# EAGLE board ascender_board (EAGLE 9.0.0)
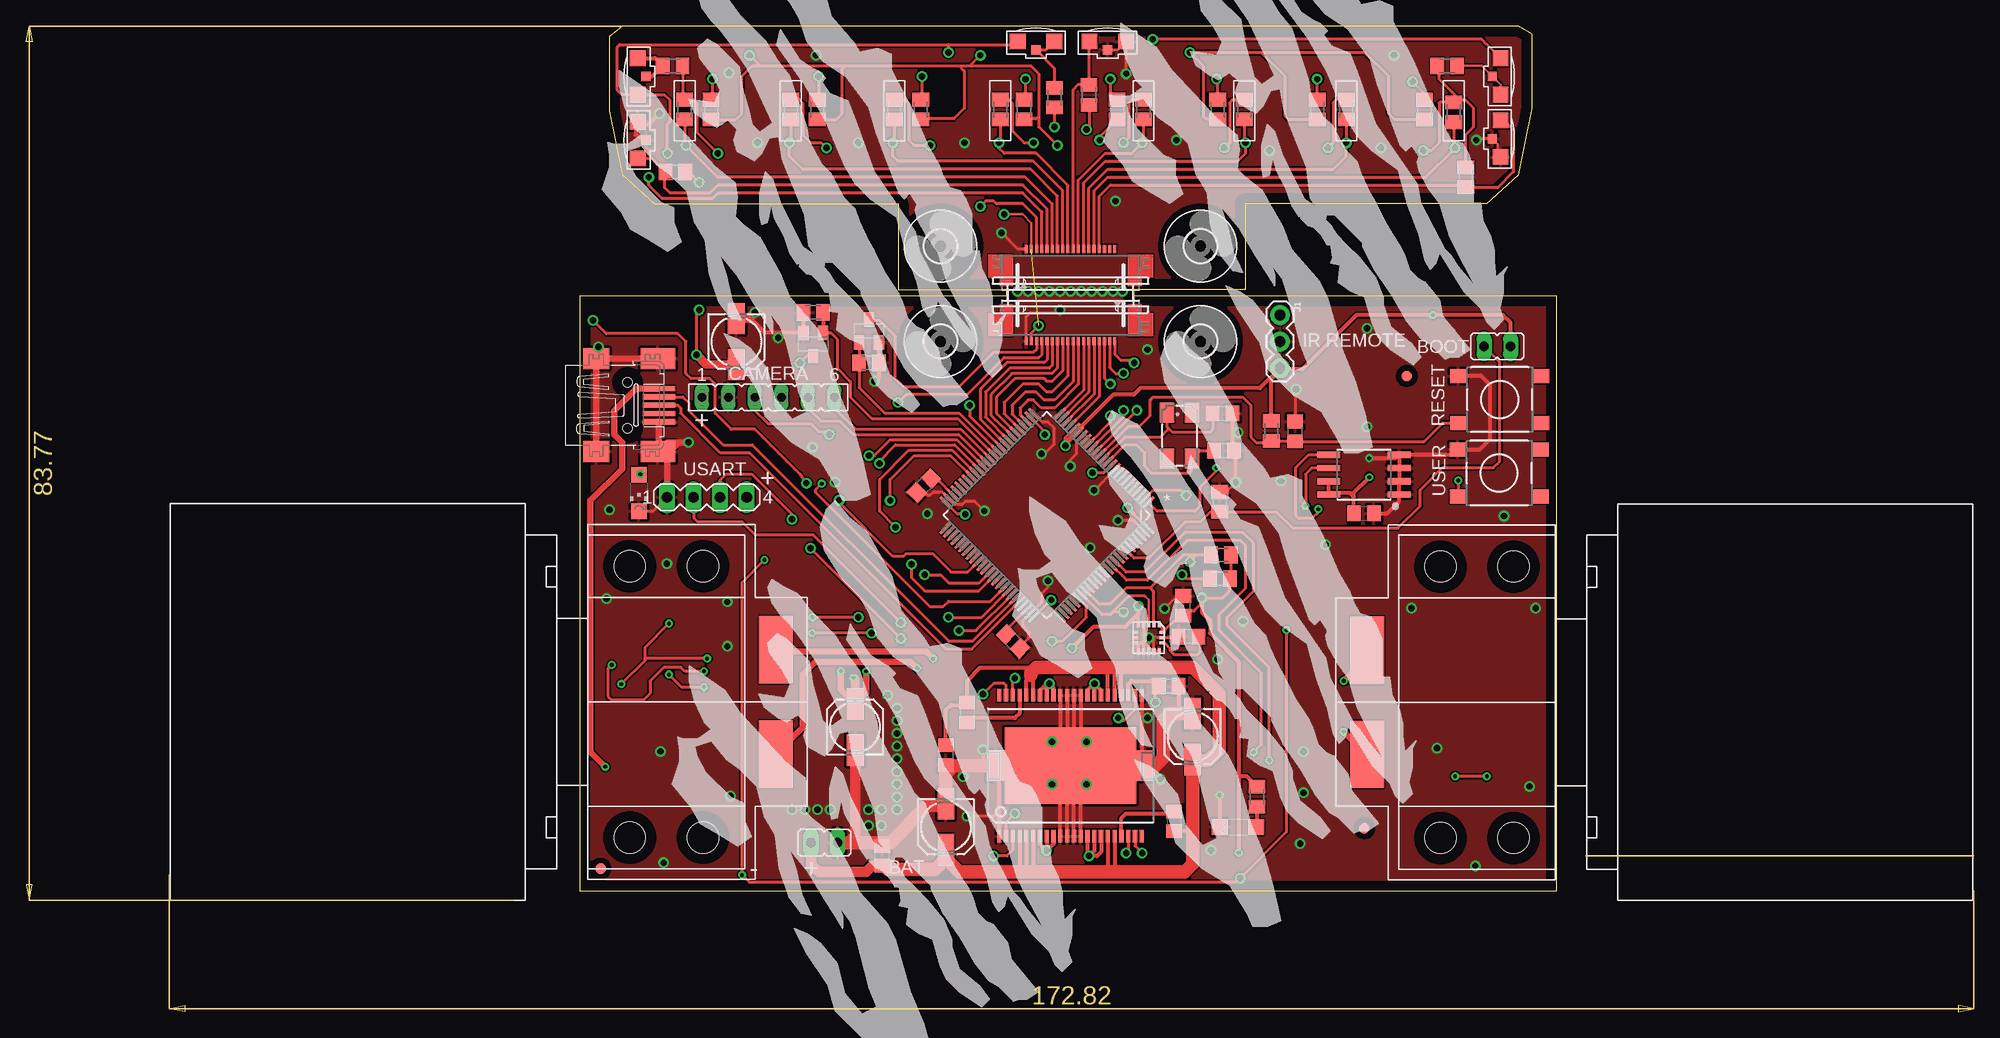
[diagram p0: board, top side]
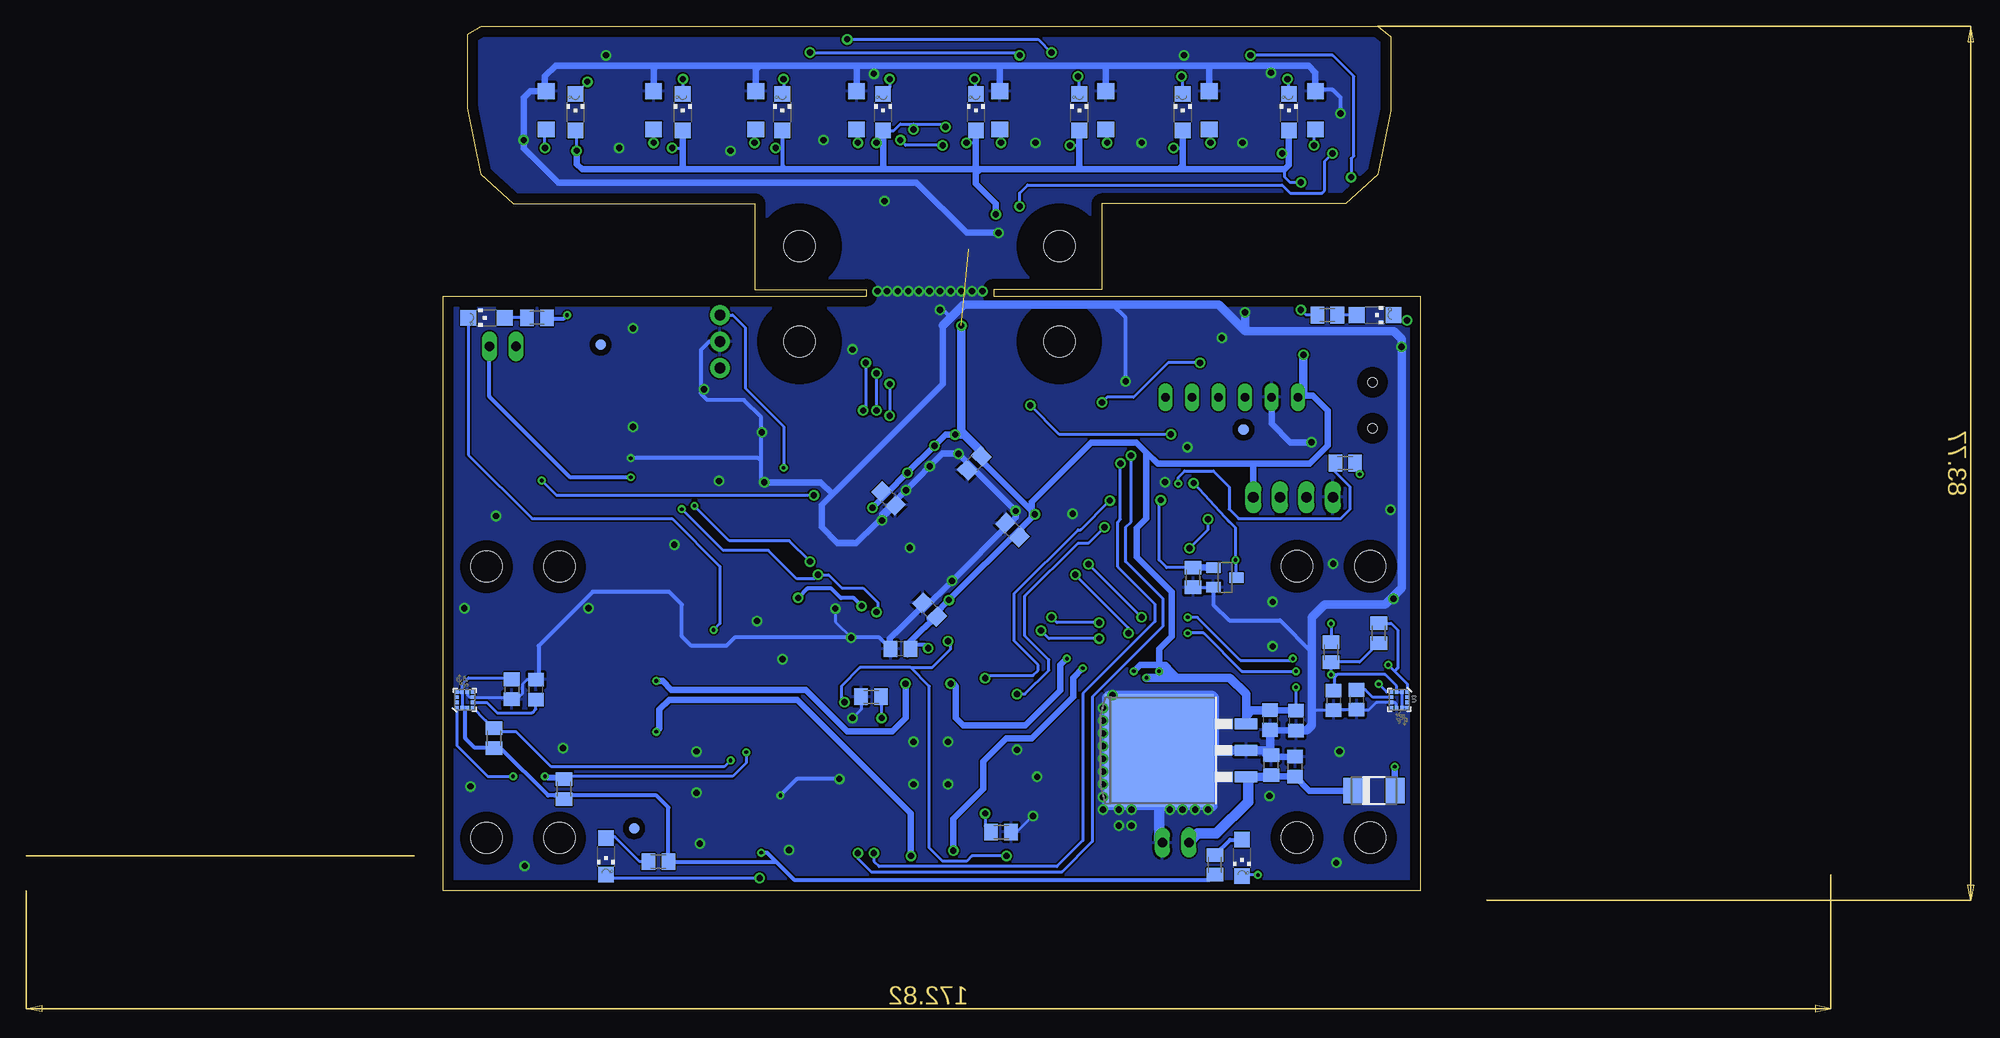
[diagram p1: board, bottom side, seen from below]

Size 93.57 x 82.86 mm. Coordinates in mm from the lower left corner, seen from the top.
Outline: 86.87,65.84 89.92,68.63 91.19,74.98 91.19,82.09 89.92,82.86 4.06,82.86 2.79,81.84 2.79,74.73 4.06,68.63 7.11,65.84 30.48,65.84 30.48,57.61 40.84,57.61 40.84,57 0,57 0,0 93.57,0 93.57,57 53.03,57 53.03,57.61 63.7,57.61 63.7,65.84 86.87,65.84
Copper layers (1*16): Top 0.035mm / dielectric 1.5mm / Bottom 0.035mm
Design rules "default *": minimum track width 8mil, minimum drill 24mil, track to track 6mil, track to pad 6mil, pad to pad 6mil, via to via 6mil, smd to smd 0mil, copper to edge 40mil, drill to drill 8mil, minimum pad ring 10mil, minimum via ring 8mil, stop-mask expansion 4mil, vias tented up to drill 0mil, thermal gap 10mil

## Footprints (pad centres in the part's own frame; a part is rotated, then mirrored left to right if it is on the bottom)
JP1 = drill 0.914 long: 1 0,-1.27; 2 0,1.27
C0805 = smd 1.3 x 1.5: 1 -0.95,0; 2 0.95,0
153CLV-0505 = smd 3 x 1.6: + 2.2,0; - -2.2,0
FE06 = drill 0.813 long: 1 -6.35,0; 2 -3.81,0; 3 -1.27,0; 4 1.27,0; 5 3.81,0; 6 6.35,0
DO-214AC = smd 1.8 x 2.4: A 2.025,0; C -2.025,0
3,0 = hole 3: 0,0
TO263-3 = smd 1.067 x 2.159: 1 -2.54,-5.791; 2 0,-5.791; 3 2.54,-5.791 | smd 10.8 x 10.41: TAB 0,2.54
HSOP44 = smd 0.4 x 1.2: 1 -6.825,-6.75; 2 -6.175,-6.75; 3 -5.525,-6.75; 4 -4.875,-6.75; 5 -4.225,-6.75; 6 -3.575,-6.75; 7 -2.925,-6.75; 8 -2.275,-6.75; 9 -1.625,-6.75; 10 -0.975,-6.75; 11 -0.325,-6.75; 12 0.325,-6.75; 13 0.975,-6.75; 14 1.625,-6.75; 15 2.275,-6.75; 16 2.925,-6.75; 17 3.575,-6.75; 18 4.225,-6.75; 19 4.875,-6.75; 20 5.525,-6.75; 21 6.175,-6.75; 22 6.825,-6.75; 23 6.825,6.75; 24 6.175,6.75; 25 5.525,6.75; 26 4.875,6.75; 27 4.225,6.75; 28 3.575,6.75; 29 2.925,6.75; 30 2.275,6.75; 31 1.625,6.75; 32 0.975,6.75; 33 0.325,6.75; 34 -0.325,6.75; 35 -0.975,6.75; 36 -1.625,6.75; 37 -2.275,6.75; 38 -2.925,6.75; 39 -3.575,6.75; 40 -4.225,6.75; 41 -4.875,6.75; 42 -5.525,6.75; 43 -6.175,6.75; 44 -6.825,6.75 | smd 12.6 x 7.3: EH@1 0,0 | smd 1.7 x 2.9: EH@2 -7.15,0; EH@3 7.15,0
1X03 = drill 1.016 pad 1.88: 1 0,0; 2 2.54,0; 3 5.08,0
CHIPLED_1206 = smd 1.5 x 1.5: A 0,-1.75; C 0,1.75
CTS406 = smd 1.9 x 1.4: 1 -2.2,-1.2; 2 2.2,-1.2; 3 2.2,1.2; 4 -2.2,1.2
SOT23 = smd 1 x 1.4: 1 -0.95,-1.1; 2 0.95,-1.1; 3 0,1.1
M0805 = smd 1.3 x 1.6: 1 -0.95,0; 2 0.95,0
DTSM-6 = smd 1.55 x 1.3: 1 -3.975,2.25; 2 3.975,2.25; 3 -3.975,-2.25; 4 3.975,-2.25
QFP50P1600X1600X160-100N = smd 1.473 x 0.254: 1 -7.722,5.994; 2 -7.722,5.512; 3 -7.722,5.004; 4 -7.722,4.496; 5 -7.722,3.988; 6 -7.722,3.505; 7 -7.722,2.997; 8 -7.722,2.489; 9 -7.722,2.007; 10 -7.722,1.499; 11 -7.722,0.991; 12 -7.722,0.508; 13 -7.722,0; 14 -7.722,-0.508; 15 -7.722,-0.991; 16 -7.722,-1.499; 17 -7.722,-2.007; 18 -7.722,-2.489; 19 -7.722,-2.997; 20 -7.722,-3.505; 21 -7.722,-3.988; 22 -7.722,-4.496; 23 -7.722,-5.004; 24 -7.722,-5.512; 25 -7.722,-5.994; 51 7.722,-5.994; 52 7.722,-5.512; 53 7.722,-5.004; 54 7.722,-4.496; 55 7.722,-3.988; 56 7.722,-3.505; 57 7.722,-2.997; 58 7.722,-2.489; 59 7.722,-2.007; 60 7.722,-1.499; 61 7.722,-0.991; 62 7.722,-0.508; 63 7.722,0; 64 7.722,0.508; 65 7.722,0.991; 66 7.722,1.499; 67 7.722,2.007; 68 7.722,2.489; 69 7.722,2.997; 70 7.722,3.505; 71 7.722,3.988; 72 7.722,4.496; 73 7.722,5.004; 74 7.722,5.512; 75 7.722,5.994 | smd 0.254 x 1.473: 26 -5.994,-7.722; 27 -5.512,-7.722; 28 -5.004,-7.722; 29 -4.496,-7.722; 30 -3.988,-7.722; 31 -3.505,-7.722; 32 -2.997,-7.722; 33 -2.489,-7.722; 34 -2.007,-7.722; 35 -1.499,-7.722; 36 -0.991,-7.722; 37 -0.508,-7.722; 38 0,-7.722; 39 0.508,-7.722; 40 0.991,-7.722; 41 1.499,-7.722; 42 2.007,-7.722; 43 2.489,-7.722; 44 2.997,-7.722; 45 3.505,-7.722; 46 3.988,-7.722; 47 4.496,-7.722; 48 5.004,-7.722; 49 5.512,-7.722; 50 5.994,-7.722; 76 5.994,7.722; 77 5.512,7.722; 78 5.004,7.722; 79 4.496,7.722; 80 3.988,7.722; 81 3.505,7.722; 82 2.997,7.722; 83 2.489,7.722; 84 2.007,7.722; 85 1.499,7.722; 86 0.991,7.722; 87 0.508,7.722; 88 0,7.722; 89 -0.508,7.722; 90 -0.991,7.722; 91 -1.499,7.722; 92 -2.007,7.722; 93 -2.489,7.722; 94 -2.997,7.722; 95 -3.505,7.722; 96 -3.988,7.722; 97 -4.496,7.722; 98 -5.004,7.722; 99 -5.512,7.722; 100 -5.994,7.722
SO08-EIAJ = smd 0.61 x 2.21: 1 -1.905,-3.378; 2 -0.635,-3.378; 3 0.635,-3.378; 4 1.905,-3.378; 5 1.905,3.353; 6 0.635,3.353; 7 -0.635,3.353; 8 -1.905,3.353
SPARKFUN-DIGITALIC_LGA-12 = smd 0.375 x 0.35: 1 -0.75,0.75; 2 -0.75,0.25; 3 -0.75,-0.25; 4 -0.75,-0.75; 7 0.75,-0.75; 8 0.75,-0.25; 9 0.75,0.25; 10 0.75,0.75 | smd 0.35 x 0.375: 5 -0.25,-0.75; 6 0.25,-0.75; 11 0.25,0.75; 12 -0.25,0.75
ST_LGA16L = smd 0.6 x 0.3: P$1 -1.3,1; P$2 -1.3,0.5; P$3 -1.3,0; P$4 -1.3,-0.5; P$5 -1.3,-1; P$9 1.3,-1; P$10 1.3,-0.5; P$11 1.3,0; P$12 1.3,0.5; P$13 1.3,1 | smd 0.3 x 0.6: P$6 -0.5,-1.3; P$7 0,-1.3; P$8 0.5,-1.3; P$14 0.5,1.3; P$15 0,1.3; P$16 -0.5,1.3
FIDUCIAL_1MM = smd 1 x 1: 1 0,0
SFH3710 = smd 1.52 x 1.6: P$1 -1.75,0; P$2 1.9,0
KPA3010 = smd 1.5 x 1.5: P$1_COL -1.75,0.8; P$2_EM 1.75,0.8 | smd 0.9 x 0.9: P$3-NC 0,0
JSUMO_MOTOR_WITH_WHEEL = smd 3.251 x 6.452: P$1 18,5; P$2 18,-5 | hole 3: 4,-13; 11,-13; 4,13; 11,13
MA04-1 = drill 1.016 long: 1 -3.81,0; 2 -1.27,0; 3 1.27,0; 4 3.81,0
52745-1890 = smd 0.3 x 0.8: 1 -4.25,2.5; 2 -3.75,2.5; 3 -3.25,2.5; 4 -2.75,2.5; 5 -2.25,2.5; 6 -1.75,2.5; 7 -1.25,2.5; 8 -0.75,2.5; 9 -0.25,2.5; 10 0.25,2.5; 11 0.75,2.5; 12 1.25,2.5; 13 1.75,2.5; 14 2.25,2.5; 15 2.75,2.5; 16 3.25,2.5; 17 3.75,2.5; 18 4.25,2.5
32005-201 = smd 3.1 x 0.5: 1 3,1.6; 2 3,0.8; 3 3,0; 4 3,-0.8; 5 3,-1.6 | smd 2.5 x 2: M1 -3,-4.45; M2 -3,4.45 | smd 3.3 x 2: M3 2.9,4.45; M4 2.9,-4.45 | hole 0.9: 0,2.2; 0,-2.2

## Placement (x,y rotation side)
BAT  LiPol  [JP1]  23.42,4.62 90 top
BOOT  [JP1]  87.86,52.17 270 top
C1  [C0805]  61.54,45.75 0 top
C2  18p  [C0805]  61.7,42.19 0 top
C3  100n  [C0805]  68.5,44.02 90 top
C4  2.2uF  [C0805]  32.94,38.84 225 top
C5  2.2uF  [C0805]  41.48,23.9 135 top
C6  100n  [C0805]  42.7,40.97 225 bottom
C7  100n  [C0805]  39.04,34.57 135 bottom
C8  100n  [C0805]  46.96,26.95 135 bottom
C9  100n  [C0805]  50.93,37.62 315 bottom
C10  100n  [C0805]  14.26,12.06 90 bottom
C11  10uF  [C0805]  11.97,11.9 90 bottom
C12  100n  [C0805]  11.87,16.32 270 bottom
C13  10uF  [C0805]  14.36,16.37 270 bottom
C14  10n  [C0805]  58.29,24.36 180 top
C15  100n  [C0805]  57.78,27.31 90 top
C16  100n  [C0805]  49.77,23.18 180 bottom
C17  100n  [C0805]  37.08,17.07 270 top
C18  100n  [C0805]  56.9,6.65 270 top
C19  100n  [C0805]  35.05,13 270 top
C20  [153CLV-0505]  35.05,6.15 270 top
C21  [153CLV-0505]  58.67,14.78 270 top
C22  [153CLV-0505]  26.37,15.7 90 top
C23  100n  [C0805]  28.96,3.35 90 top
C24  [153CLV-0505]  14.99,52.63 270 top
C25  100n  [C0805]  6.09,18.3 270 bottom
C26  100n  [C0805]  75.08,36.17 0 top
C27  100n  [C0805]  8.29,18.25 270 bottom
C28  100n  [C0805]  84.68,19.29 90 bottom
C29  100n  [C0805]  87,19.3 270 bottom
CAMERA  [FE06]  18.03,47.3 0 top
D1  [DO-214AC]  4.42,9.6 0 bottom
H1  MOUNT-HOLE3.0  [3,0]  59.44,61.77 0 top
H2  MOUNT-HOLE3.0  [3,0]  34.54,61.77 0 top
H3  MOUNT-HOLE3.0  [3,0]  59.44,52.63 0 top
H4  MOUNT-HOLE3.0  [3,0]  34.54,52.63 0 top
IC1  LM2937  [TO263-3]  22.45,13.46 90 bottom
IC2  MC33932  [HSOP44]  46.99,11.99 0 top
J1  455-1750-1-ND  [1X03]  67.06,55.17 270 top
LED1  [CHIPLED_1206]  5.65,38.13 180 top
LED2  [CHIPLED_1206]  63.03,6.11 90 top
LED3  [CHIPLED_1206]  4.32,55.17 270 bottom
LED4  [CHIPLED_1206]  89.41,54.91 90 bottom
LED5  [CHIPLED_1206]  77.98,3.3 180 bottom
LED6  [CHIPLED_1206]  17.07,3.15 180 bottom
LED7  [CHIPLED_1206]  80.9,74.6 0 bottom
LED8  [CHIPLED_1206]  70.61,74.6 0 bottom
LED9  [CHIPLED_1206]  61.09,74.6 0 bottom
LED10  [CHIPLED_1206]  51.44,74.6 0 bottom
LED11  [CHIPLED_1206]  42.55,74.6 0 bottom
LED12  [CHIPLED_1206]  32.64,74.6 0 bottom
LED13  [CHIPLED_1206]  22.73,74.6 0 bottom
LED14  [CHIPLED_1206]  12.57,74.6 0 bottom
Q1  8MHz  [CTS406]  57.43,43.61 270 top
Q2  BSS123  [SOT23]  22.35,52.38 180 top
Q3  BSS123  [SOT23]  27.69,53.65 0 top
Q4  BSS123  [SOT23]  18.69,30.02 270 bottom
R1  4k7  [M0805]  66.22,44.07 90 top
R2  4k7  [M0805]  61.29,37.26 270 top
R3  4k7  [M0805]  7.18,40.98 180 bottom
R4  4k7  [M0805]  61.29,29.9 0 top
R5  4k7  [M0805]  61.39,32.18 0 top
R6  4k7  [M0805]  64.86,9.03 90 top
R7  4k7  [M0805]  56.39,19.61 180 top
R8  4k7  [M0805]  40.13,5.64 180 bottom
R9  4k7  [M0805]  52.58,18.59 180 bottom
R10  4k7  [M0805]  22.35,55.42 0 top
R11  4k7  [M0805]  27.69,50.6 180 top
R12  4k7  [M0805]  21.74,30.02 90 bottom
R13  330  [M0805]  8.89,55.17 180 bottom
R14  330  [M0805]  84.58,54.91 0 bottom
R15  330  [M0805]  72.95,2.79 0 bottom
R16  330  [M0805]  19.66,2.49 270 bottom
R17  4k7  [M0805]  3.96,24.69 270 bottom
R18  4k7  [M0805]  83.69,74.6 90 top
R19  330  [M0805]  80.9,74.85 90 top
R20  4k7  [M0805]  73.41,74.85 90 top
R21  330  [M0805]  70.61,74.85 90 top
R22  4k7  [M0805]  63.63,74.85 90 top
R23  330  [M0805]  61.09,74.85 90 top
R24  4k7  [M0805]  53.98,74.85 90 top
R25  330  [M0805]  51.44,74.85 90 top
R26  4k7  [M0805]  40.26,74.85 90 top
R27  330  [M0805]  42.55,74.85 90 top
R28  4k7  [M0805]  30.1,74.85 90 top
R29  330  [M0805]  32.64,74.85 90 top
R30  4k7  [M0805]  20.19,74.85 90 top
R31  330  [M0805]  22.73,74.85 90 top
R32  4k7  [M0805]  10.03,74.85 90 top
R33  330  [M0805]  12.57,74.85 90 top
R34  4k7  [M0805]  84.84,68.38 90 top
R35  22  [M0805]  45.47,76 270 top
R36  4k7  [M0805]  48.77,76.25 270 top
R37  22  [M0805]  8.89,79.05 0 top
R38  4k7  [M0805]  9.14,68.89 0 top
R39  22  [M0805]  83.06,79.05 180 top
R40  4k7  [M0805]  8.53,22.86 270 bottom
R41  4k7  [M0805]  81.99,9.75 270 bottom
R42  4k7  [M0805]  88.7,14.63 270 bottom
RESET  DTSM-6  [DTSM-6]  88.1,47.07 0 top
RUN  DTSM-6  [DTSM-6]  88.04,40.03 0 top
U1  STM32F722XX  [QFP50P1600X1600X160-100N]  44.73,35.99 225 top
U2  I2C EEPROM  [SO08-EIAJ]  75.08,39.88 90 top
U3  SPARKFUN-DIGITALIC_LSM303C  [SPARKFUN-DIGITALIC_LGA-12]  2,18.3 270 bottom
U4  SPARKFUN-DIGITALIC_LSM303C  [SPARKFUN-DIGITALIC_LGA-12]  91.5,18.3 90 bottom
U$1  [SCAR]  23.57,41.5 225 top
U$2  ST_L3GD20H  [ST_LGA16L]  54.48,24.26 270 top
U$3  FIDUCIAL  [FIDUCIAL_1MM]  75.13,5.99 0 top
U$4  FIDUCIAL  [FIDUCIAL_1MM]  79.2,49.33 0 top
U$5  FIDUCIAL  [FIDUCIAL_1MM]  1.98,2.13 0 top
U$6  FIDUCIAL  [FIDUCIAL_1MM]  16.92,44.2 0 bottom
U$7  FIDUCIAL  [FIDUCIAL_1MM]  75.29,5.99 0 bottom
U$8  FIDUCIAL  [FIDUCIAL_1MM]  78.49,52.32 0 bottom
U$11  SFH3710  [SFH3710]  83.69,74.85 270 bottom
U$12  KPA3010  [KPA3010]  87.38,72.06 270 top
U$13  KPA3010_EM  [KPA3010]  43.69,80.57 0 top
U$14  SFH3710  [SFH3710]  73.41,74.85 270 bottom
U$15  SFH3710  [SFH3710]  63.63,74.85 270 bottom
U$16  SFH3710  [SFH3710]  53.98,74.85 270 bottom
U$17  SFH3710  [SFH3710]  40.26,74.85 270 bottom
U$18  SFH3710  [SFH3710]  30.1,74.85 270 bottom
U$19  SFH3710  [SFH3710]  20.19,74.85 270 bottom
U$20  SFH3710  [SFH3710]  10.03,74.85 270 bottom
U$21  [SCAR]  64.92,103.06 225 top  (outside the outline)
U$22  [SCAR]  16.87,98.49 225 top  (outside the outline)
U$24  [SCAR]  56.19,57.65 225 top
U$26  JSUMO_MOTOR_WITH_WHEEL  [JSUMO_MOTOR_WITH_WHEEL]  0.78,18.1 0 top
U$27  JSUMO_MOTOR_WITH_WHEEL  [JSUMO_MOTOR_WITH_WHEEL]  93.41,18.07 180 top
U$29  KPA3010  [KPA3010]  50.55,80.57 0 top
U$30  KPA3010_EM  [KPA3010]  6.35,78.03 90 top
U$31  KPA3010  [KPA3010]  6.35,71.93 90 top
U$32  KPA3010_EM  [KPA3010]  87.38,78.03 270 top
USART  [MA04-1]  12.17,37.72 0 top
X2  52745-1890  [52745-1890]  46.99,55.17 180 top
X3  52745-1890  [52745-1890]  46.99,58.98 0 top
X4  MINI-USB-SCHIELD-32005-201  [32005-201]  4.57,46.53 0 top

## Library data of the parts
BAT BOOT = jumper
C1-C29 R1-R42 = resistor
CAMERA = con-lsta; OC_FARNELL: unknown; OC_NEWARK: unknown
D1 = diode
H1-H4 = holes
IC1 LED1-LED14 U$11-U$20 U$29-U$32 = my_parts
IC2 = freescale; MPN: MC33932VW; OC_FARNELL: 1701639; OC_NEWARK: 67P3304
J1 = SparkFun-Connectors; PROD_ID: XXX-00000
Q1 = crystal; OC_FARNELL: unknown; OC_NEWARK: unknown
Q2-Q4 = transistor-small-signal
RESET RUN = switch-tact
U1 = stm32; MPN: STM32F407VET6; OC_FARNELL: 2064367; OC_NEWARK: 73T2332; PACKAGE: 100LQFP; SUPPLIER: STMicroelectronics
U2 = SparkFun-IC-Memory; PROD_ID: NA-XXXXX
U3 U4 = SparkFun_LSM303C_6_DOF_IMU_Breakout
U$1 U$21 U$22 U$24 = shapes
U$2 = main
U$3-U$8 = adafruit
U$26 U$27 = my_libs
USART = con-lstb; OC_FARNELL: unknown; OC_NEWARK: unknown
X2 X3 = con-molex; MF: MOLEX; MPN: 52745-1890; OC_FARNELL: unknown; OC_NEWARK: 66F4273
X4 = con-cypressindustries; OC_FARNELL: unknown; OC_NEWARK: unknown

## Nets
+3V3: BOOT.2 C6.1 C7.1 C8.1 C9.1 C12.1 C13.1 C15.1 C16.1 C22.+ C24.+ C26.1 C27.1 C29.1 CAMERA.1 IC1.3 J1.3 LED7.A LED8.A LED9.A LED10.A LED11.A LED12.A LED13.A LED14.A R1.2 R4.2 R5.2 R6.2 R13.2 R14.2 R15.2 R16.2 R17.2 R18.2 R20.2 R22.2 R24.2 R26.2 R28.2 R30.2 R32.2 R34.2 R35.2 R36.2 R37.2 R38.2 R39.2 R40.2 R41.2 R42.2 U1.11 U1.20 U1.21 U1.27 U1.50 U1.75 U1.100 U2.7 U2.8 U3.2 U3.3 U3.9 U3.10 U4.2 U4.3 U4.9 U4.10 U$2.P$1 U$2.P$5 U$2.P$16 USART.4 X2.17 X3.2
ADC0: U1.22 X2.4
ADC1: U1.23 X2.5
ADC1_S: R18.1 U$11.P$2 X3.14
ADC2: U1.24 X2.6
ADC2_S: R20.1 U$14.P$2 X3.13
ADC3: U1.25 X2.7
ADC3_S: R22.1 U$15.P$2 X3.12
ADC4: U1.28 X2.8
ADC4_S: R24.1 U$16.P$2 X3.11
ADC5: U1.29 X2.9
ADC6: U1.30 X2.10
ADC6_S: R26.1 U$17.P$2 X3.9
ADC7: U1.31 X2.11
ADC7_S: R28.1 U$18.P$2 X3.8
ADC8: U1.32 X2.12
ADC8_S: R30.1 U$19.P$2 X3.7
ADC9: U1.33 X2.13
ADC9_S: R32.1 U$20.P$2 X3.6
ADC10: U1.34 X2.14
ADC11: CAMERA.3 U1.35
BOOT: BOOT.1 R2.2 U1.94
CAM_CLK: CAMERA.5 U1.39
CAM_SI: CAMERA.6 U1.38
ENC_LEFT_SCL: R17.1 U1.63 U3.1
ENC_LEFT_SDA: R40.1 U1.64 U3.4
ENC_RIGHT_SCL: R41.1 U1.90 U4.1
ENC_RIGHT_SDA: R42.1 U1.91 U4.4
FRONT_GPIO: U1.17 X2.3
FRONT_SCL: U1.15 X2.1
FRONT_SDA: U1.16 X2.2
GND: BAT.1 C1.2 C2.2 C3.2 C4.2 C5.1 C6.2 C7.2 C8.2 C9.2 C10.2 C11.2 C12.2 C13.2 C14.2 C15.2 C16.2 C19.2 C20.- C21.- C22.- C23.2 C24.- C25.2 C26.2 C27.2 C28.2 C29.2 CAMERA.2 IC1.2 IC2.1 IC2.10 IC2.11 IC2.12 IC2.13 IC2.23 IC2.32 IC2.33 IC2.34 IC2.35 IC2.EH@1 IC2.EH@2 IC2.EH@3 J1.2 LED1.C LED2.C Q2.2 Q3.2 Q4.2 R2.1 R7.1 R8.1 R9.2 R10.1 R11.1 R12.1 RESET.1 RUN.1 U1.10 U1.19 U1.26 U1.49 U1.74 U1.99 U2.1 U2.2 U2.3 U2.4 U3.6 U3.8 U4.6 U4.8 U$2.P$4 U$2.P$8 U$2.P$9 U$2.P$10 U$2.P$11 U$2.P$12 U$2.P$13 U$2.P$15 U$11.P$1 U$12.P$2_EM U$12.P$3-NC U$14.P$1 U$15.P$1 U$16.P$1 U$17.P$1 U$18.P$1 U$19.P$1 U$20.P$1 U$29.P$2_EM U$29.P$3-NC U$31.P$2_EM U$31.P$3-NC USART.1 X2.18 X3.1 X4.5 X4.M1 X4.M2 X4.M3 X4.M4
IR_A: Q2.3 X2.15
IR_A_CONTROLL: Q2.1 R10.2 U1.37
IR_A_S: R19.1 R21.1 R23.1 R25.1 R27.1 R29.1 R31.1 R33.1 X3.4
IR_B: Q3.3 X2.16
IR_B_CONTROLL: Q3.1 R11.2 U1.36
IR_B_S: U$13.P$1_COL U$30.P$1_COL U$32.P$1_COL X3.3
IR_FRONT_S: R36.1 U$29.P$1_COL X3.10
IR_LEFT_S: R38.1 U$31.P$1_COL X3.5
IR_REMOTE: J1.1 U1.1
IR_RIGHT_S: R34.1 U$12.P$1_COL X3.15
KEY: RUN.3 U1.2
LED: R3.2 U1.67
LED_BACK: Q4.1 R12.2 U1.60
MOTOR_ENABLE: IC2.3 IC2.25 R7.2 U1.81
N$1: C2.1 Q1.3 U1.12
N$2: C1.1 Q1.1 U1.13
N$3: C4.1 U1.48
N$4: C5.2 U1.73
N$5: LED1.A R3.1
N$6: C14.1 U$2.P$14
N$7: IC2.7 IC2.8 IC2.9 U$26.P$2
N$8: IC2.36 IC2.37 IC2.38 U$26.P$1
N$9: IC2.14 IC2.15 IC2.16 U$27.P$1
N$10: IC2.29 IC2.30 IC2.31 U$27.P$2
N$11: LED2.A R6.1
N$12: C17.2 IC2.41
N$13: IC2.2 R8.2
N$14: C18.1 IC2.19
N$15: IC2.24 R9.1
N$16: LED3.C LED4.C LED5.C LED6.C Q4.3
N$17: LED3.A R13.1
N$18: D1.A X4.1
N$19: LED4.A R14.1
N$20: C28.1 U4.5
N$21: LED5.A R15.1
N$22: LED8.C R21.2
N$23: LED6.A R16.1
N$24: LED7.C R19.2
N$25: LED9.C R23.2
N$26: LED10.C R25.2
N$27: LED11.C R27.2
N$28: LED12.C R29.2
N$29: LED13.C R31.2
N$30: LED14.C R33.2
N$31: R37.1 U$30.P$2_EM U$30.P$3-NC
N$32: R35.1 U$13.P$2_EM U$13.P$3-NC
N$33: R39.1 U$32.P$2_EM U$32.P$3-NC
N$34: C25.1 U3.5
NC: CAMERA.4
PWM_A_LEFT: IC2.43 U1.42
PWM_A_RIGHT: IC2.21 U1.40
PWM_B_LEFT: IC2.42 U1.43
PWM_B_RIGHT: IC2.20 U1.41
RESET: C3.1 R1.1 RESET.3 U1.14
SCL: R5.1 U1.83 U2.6 U$2.P$2
SDA: R4.1 U1.82 U2.5 U$2.P$3
USART1_RX: U1.69 USART.3
USART1_TX: U1.68 USART.2
USBDM: U1.70 X4.2
USBDP: U1.71 X4.3
VBAT: U1.6
VCC: BAT.2 C10.1 C11.1 C17.1 C18.2 C19.1 C20.+ C21.+ C23.1 D1.C IC1.1 IC2.4 IC2.5 IC2.6 IC2.17 IC2.18 IC2.26 IC2.27 IC2.28 IC2.39 IC2.40

## Tracks (layer width: path | path; a pad name or v marks a point on that pad's centre or on a via)
+3V3  (via drill 0.35, 0.6)  (1 unrouted)
  Top 0.254: v40.64,64.82 42.42,64.82 43.24,64 X3.2 | R39.2 82.11,78.47
  Top 0.305: U1.100 54.38,34.77 v52.45,36.7 53.36,35.79 | v36.91,36.09 36.15,36.09 U1.50 | v44.52,43.71 44.52,43.99 U1.27 | v49.1,40.06 50.19,40.06 U1.11 | 46.51,42.73 46.51,42.98 46.51,43.41 U1.21 | U1.20 47.71,43.85 v46.51,42.65 | v45.13,27.87 45.08,27.87 U1.75 | U$2.P$1 55.78,25.26 U$2.P$16 57.48,26.46 C15.1 58.13,26.8 58.8,26.8 59.56,27.56 v59.56,28.07 61.55,28.07 62.23,28.75 62.23,29.26 | U$2.P$5 53.48,26.52 | R5.2 62.34,29.37 62.23,29.26 | 62.23,29.26 R4.2 | v11.18,51.36 11.18,55.42 v11.43,55.68 | X2.17 43.24,53.45 v43.94,54.15 | R37.2 9.84,76 R32.2 10.86,75.8 11.18,75.49 11.18,72.7 v13.21,70.66 | R38.2 10.41,68.89 v11.43,67.87 | R30.2 21.02,75.8 21.34,75.49 21.34,72.44 22.1,71.68 23.11,71.68 v23.62,71.17 | R28.2 31.18,75.8 31.5,75.49 31.5,71.93 32,71.43 v33.53,71.43 | R26.2 41.09,75.8 41.4,75.49 41.4,72.82 42.55,71.68 v43.43,71.68 | v45.47,73.2 R35.2 | R36.2 48.77,73.2 v48.51,72.95 | R24.2 52.89,75.8 52.58,75.49 52.58,72.19 v52.07,71.68 | R20.2 72.45,75.8 72.14,75.49 72.14,71.68 v71.63,71.17 | 62.23,71.68 62.23,75.49 62.55,75.8 R22.2 | R34.2 84.84,72.44 85.6,73.2 85.6,74.98 84.84,75.74 83.89,75.74 83.82,75.68 | 83.82,75.68 R18.2 82.36,75.55 82.3,75.49 82.3,71.68 81.53,70.92 v80.77,70.92 | 83.82,75.68 83.82,76.25 82.3,77.78 82.3,78.86 R39.2 | v11.89,19.51 9.75,19.51 v8.53,20.73
  Top 0.406: 52.96,36.2 v52.45,36.7 | U2.8 71.73,38.1 | 71.73,38.1 U2.7 | 62.23,71.68 v61.72,71.17 | v47.12,23.24 49.15,25.27 52.24,25.27 53.48,26.52 v53.48,27.29 | 71.73,38.1 73.76,38.1 74.13,37.73 C26.1 74.13,38.17 v75.59,39.62 | BOOT.2 89.13,54.43 88.39,55.17 v81.69,55.17 74.37,55.17 69.19,49.99 67.16,49.99 | 67.16,49.99 J1.3 65.13,48.16 53.65,48.16 53.03,47.55 51.08,47.55 46.72,43.19 | R1.2 66.22,49.05 67.16,49.99 | v46.51,42.65 46.51,42.73 46.72,42.95 46.72,43.19 | 46.72,43.19 46.51,42.98 | v59.56,28.07 59.56,26.7 60.35,25.91 60.35,24.69 63.09,21.95 63.09,10.97 | 63.09,10.97 v63.09,3.66 | R6.2 63.86,10.97 63.09,10.97
  Top 0.61: v24.99,21.03 24.99,19.27 C22.+ 27.43,18.96 v27.43,21.03
  Top 0.813: C24.+ 12.11,50.43 v11.18,51.36 | C22.+ 26.36,20.27 v26.21,20.42
  Bottom 0.305: 37.21,36.4 v36.91,36.09 | C7.1 38.73,34.27 38.12,34.88 | C6.1 42.09,41.29 41.78,40.97 | C9.1 51.22,38.22 51.08,38.08 | C8.1 46.51,26.49 | 48.92,22.68 49.11,22.48 | R13.2 10.92,55.17 v11.43,55.68 | 42.7,72.7 LED11.A | v13.21,70.66 12.57,70.66 | v11.43,67.87 12.45,67.87 12.95,68.38 12.95,69.27 12.57,69.65 | v23.62,71.17 22.73,71.17 | v33.53,71.43 32.64,71.43 | v43.43,71.68 42.55,71.68 | LED10.A 50.39,72.85 49.78,73.46 48.51,73.46 | 48.51,73.46 45.72,73.46 v45.47,73.2 | v48.51,72.95 48.51,73.46 | v52.07,71.68 51.44,71.68 | v71.63,71.17 70.61,71.17 | v80.77,70.92 80.77,72.72 | R14.2 83.57,54.85 | U4.9 U4.2 91.44,17.55 U4.3 | U4.10 U4.9 | U4.9 91.75,19.81 91.14,20.42 87.17,20.42 C29.1 | U3.10 U3.9 U3.2 U3.3 2.25,19.62 3.35,20.73 7.92,20.73 | 7.92,20.73 8.23,20.42 8.23,19.27 C27.1 | C12.1 11.87,19.5 v11.89,19.51 | 7.92,20.73 v8.53,20.73 R40.2 5.79,21.91 R17.2 | R42.2 89.88,13.68 89.92,13.72 | R41.2 82.33,9.14 82.91,9.14
  Bottom 0.406: LED9.A 61.09,71.17 | 61.09,71.17 61.09,69.52 60.71,69.14 | 61.09,71.17 v61.72,71.17 | 61.67,2.79 R15.2 72,7.99 73.15,9.14 82.91,9.14 83.52,9.14 88.09,13.72 89.92,13.72 90.53,13.72 91.44,14.63 91.44,17.55 | 61.67,2.79 59.94,1.07 20.13,1.07 R16.2 | 49.11,23.6 47.47,23.6 v47.12,23.24 | v53.48,27.29 54.23,28.04 55.47,28.04 56.39,28.96 58.67,28.96 v59.56,28.07 | 83.57,54.85 82.01,54.85 v81.69,55.17 | v75.59,39.62 81.38,39.62 89.13,47.37 BOOT.2 | 61.67,2.79 62.53,3.66 v63.09,3.66
  Bottom 0.61: v52.45,36.7 51.08,38.08 v49.1,40.06 v46.51,42.65 45.44,43.71 v44.52,43.71 | 41.78,40.97 37.21,36.4 | 37.21,36.4 37.21,35.79 38.12,34.88 v45.13,27.87 46.51,26.49 46.96,26.04 | C8.1 47.78,24.93 49.11,23.6 48.92,23.4 C16.1 48.92,22.68 | 37.21,36.4 37.21,37.26 31.5,42.98 27.18,42.98 26.21,42.01 | 26.21,42.01 25.15,40.95 15.85,40.95 | LED14.A 12.57,70.66 12.57,69.65 12.57,69.52 12.95,69.14 23.11,69.14 | 23.11,69.14 32.77,69.14 | 32.77,69.14 42.16,69.14 42.29,69.01 42.55,69.01 | 51.31,69.14 42.67,69.14 42.55,69.01 | 51.31,69.14 60.71,69.14 70.36,69.14 | 70.36,69.14 80.26,69.14 80.77,69.65 v80.77,70.92 | 80.77,72.72 LED7.A | LED8.A 70.61,71.17 70.61,69.39 70.36,69.14 | LED10.A 51.44,71.68 51.44,69.27 51.31,69.14 | LED11.A 42.55,71.68 42.55,69.01 | LED13.A 22.73,71.17 22.73,69.52 23.11,69.14 | LED12.A 32.64,71.43 32.64,69.27 32.77,69.14 | 42.55,69.01 42.55,67.74 40.64,65.84 v40.64,64.82 | 23.16,20.42 23.77,21.03 | 23.77,21.03 v24.99,21.03 24.99,23.16 23.77,24.38 23.77,28.65 27.13,32 27.13,34.75 26.21,35.66 26.21,42.01 | 23.77,20.42 23.77,21.03 | 23.77,21.03 24.38,21.64 26.82,21.64 v27.43,21.03 | C12.1 14.41,17.27 14.42,17.27 | 11.51,47.47 10.29,47.47 8.84,46.02 8.84,42.67 10.57,40.95 15.85,40.95 | USART.4 15.98,40.82 15.85,40.95
  Bottom 0.813: C13.1 14.42,17.27 16.1,17.27 16.66,16.71 IC1.3 16.66,18.85 18.24,20.42 23.16,20.42 23.77,20.42 v26.21,20.42 | 11.93,17.22 C12.1 | v11.18,51.36 11.18,47.8 11.51,47.47 CAMERA.1 | v44.52,43.71 43.66,43.71 | C6.1 42.09,42.15 43.66,43.71 | v43.94,54.15 43.94,43.99 43.66,43.71
ADC0
  Top 0.305: X2.4 49.74,47.36 U1.22
ADC1
  Top 0.305: X2.5 49.24,47.58 U1.23
ADC1_S  (via drill 0.6)
  Top 0.305: R18.1 83.69,71.3 v83.82,71.17 81.03,68.38 50.55,68.38 49.24,67.07 X3.14
  Bottom 0.305: v83.82,71.17 83.82,72.83 U$11.P$2
ADC2
  Top 0.305: X2.6 48.74,47.8 U1.24
ADC2_S  (via drill 0.6)
  Top 0.305: X3.13 48.74,67.33 50.55,69.14 72.14,69.14 73.41,70.41 v73.41,71.68 R20.1
  Bottom 0.305: v73.41,71.68 U$14.P$2
ADC3
  Top 0.305: X2.7 48.24,47.98 U1.25
ADC3_S  (via drill 0.6)
  Top 0.305: X3.12 48.24,67.85 50.29,69.9 62.99,69.9 63.75,70.66 v63.75,71.68 63.63,71.81 R22.1
  Bottom 0.305: v63.75,71.68 63.75,72.83 U$15.P$2
ADC4
  Top 0.305: X2.8 47.74,48.55 45.47,46.28 44.2,46.28 43.43,47.04 42.93,47.04 42.16,46.28 42.16,45.63 U1.28
ADC4_S  (via drill 0.6)
  Top 0.305: X3.11 47.74,68.11 50.29,70.66 52.83,70.66 v53.85,71.68 53.98,71.81 R24.1
  Bottom 0.305: v53.85,71.68 53.85,72.83 U$16.P$2
ADC5
  Top 0.305: X2.9 47.24,48.81 45.47,47.04 44.45,47.04 43.69,47.8 42.67,47.8 41.4,46.53 41.4,45.68 U1.29
ADC6
  Top 0.305: X2.10 46.74,49.33 45.21,47.8 44.7,47.8 43.94,48.56 42.42,48.56 40.64,46.79 40.64,45.72 U1.30
ADC6_S  (via drill 0.6)
  Top 0.305: X3.9 46.74,67.61 43.69,70.66 40.64,70.66 40.13,71.17 v40.13,71.68 40.26,71.81 R26.1
  Bottom 0.305: v40.13,71.68 40.13,72.83 U$17.P$2
ADC7
  Top 0.305: X2.11 46.24,49.85 45.21,48.82 44.7,48.82 44.45,49.07 41.66,49.07 39.88,47.3 39.88,45.8 U1.31
ADC7_S  (via drill 0.6)
  Top 0.305: X3.8 46.24,67.1 43.43,69.9 30.48,69.9 29.97,70.41 v29.97,71.68 30.1,71.81 R28.1
  Bottom 0.305: v29.97,71.68 29.97,72.83 U$18.P$2
ADC8
  Top 0.305: X2.12 45.74,50.11 45.21,49.58 41.4,49.58 39.37,47.55 39.37,45.59 U1.32
ADC8_S  (via drill 0.6)
  Top 0.305: X3.7 45.74,66.58 43.18,69.14 21.34,69.14 20.07,70.41 v20.07,71.68 20.19,71.81 R30.1
  Bottom 0.305: v20.07,71.68 20.07,72.83 U$19.P$2
ADC9
  Top 0.305: X2.13 45.24,50.37 44.96,50.09 41.15,50.09 38.86,47.8 38.86,45.38 U1.33
ADC9_S  (via drill 0.6)
  Top 0.305: X3.6 45.24,65.81 42.67,68.38 13.21,68.38 v10.16,71.43 10.03,71.55 R32.1
  Bottom 0.305: v10.16,71.43 10.16,72.83 U$20.P$2
ADC10
  Top 0.305: X2.14 44.74,50.89 44.45,50.6 40.89,50.6 38.35,48.06 38.35,45.21 U1.34
ADC11  (via drill 0.6)
  Top 0.305: CAMERA.3 16.76,46.02 18.03,44.76 22.1,44.76 22.86,43.99 23.62,43.99 v23.88,43.74 | v37.34,46.53 37.34,45.5 U1.35
  Bottom 0.305: v23.88,43.74 34.54,43.74 v37.34,46.53
BOOT
  Top 0.305: U1.94 53.08,31.88 54.48,31.88 57.96,35.36 59.44,35.36 60.38,36.3 61.29,36.3 R2.2 66.71,36.31 68.28,34.75 78.33,34.75 80.47,36.88 80.47,38.41 82.6,40.54 87.48,40.54 88.09,41.15 88.09,50.67 BOOT.1
CAM_CLK
  Top 0.305: CAMERA.5 21.84,46.28 23.11,45.01 24.89,45.01 26.16,43.74 36.27,43.74 36.77,43.23 37.05,42.95 U1.39
CAM_SI
  Top 0.305: CAMERA.6 24.38,46.28 26.42,44.25 36.48,44.25 36.98,43.74 37.67,43.05 U1.38
ENC_LEFT_SCL  (via drill 0.35, 0.6)
  Top 0.305: v33.02,30.28 34.54,30.28 35.31,29.52 38.25,29.52 U1.63 | v27.94,24.69 v22.25,24.69 | v11.89,21.03 10.06,21.03 9.68,21.41 8.04,21.41 6.72,20.1 6.72,18.92 6.1,18.29 3.05,18.29 2.74,18.59 2.74,21.34 v3.05,21.64
  Bottom 0.305: v27.94,24.69 27.94,25.2 v33.02,30.28 | v22.25,24.69 20.73,24.69 17.07,21.03 v11.89,21.03 | U3.1 1.25,19.84 2.44,21.03 | v3.05,21.64 2.44,21.03 | R17.1 2.78,25.64 2.13,24.99 2.13,21.34 2.44,21.03
ENC_LEFT_SDA  (via drill 0.35, 0.6)
  Top 0.305: v31.75,31.29 31.75,30.02 33.02,28.75 38.21,28.75 U1.64 | v26.67,26.21 v22.25,26.21 | 6.25,22.1 6.4,22.25 v12.19,22.25 | 6.25,22.1 v3.96,19.81 | 6.25,22.1 6.25,23.32 v8.53,25.6
  Bottom 0.305: v26.67,26.21 v31.75,31.29 | v22.25,26.21 21.34,26.21 17.22,22.1 12.34,22.1 v12.19,22.25 | U3.4 3.21,19.05 v3.96,19.81 | v8.53,25.6 R40.1
ENC_RIGHT_SCL  (via drill 0.35)
  Top 0.305: v64.53,13.28 65.28,14.02 65.28,20.88 61.21,24.94 61.21,26.47 63.75,29.01 63.75,33.07 63.25,33.58 58.17,33.58 54.36,29.77 52.35,29.77 U1.90 | v86.87,10.97 v83.82,10.97
  Bottom 0.305: v64.53,13.28 64.53,12.28 65.84,10.97 v83.82,10.97 83.55,10.7 R41.1 | U4.1 92.25,13.92 89.31,10.97 v86.87,10.97
ENC_RIGHT_SDA  (via drill 0.35)
  Top 0.305: v66.04,12.5 66.04,21.39 61.98,25.45 61.98,26.21 64.52,28.75 64.52,33.33 63.5,34.34 57.91,34.34 54.1,30.53 52.31,30.53 U1.91
  Bottom 0.305: v66.04,12.5 66.65,11.89 83.21,11.89 86.56,15.24 88.44,15.24 88.78,15.58 | U4.4 89.48,16.29 88.78,15.58 | R42.1 88.78,15.58
FRONT_GPIO  (via drill 0.6)
  Top 0.305: X2.3 50.24,49.12 v50.8,48.56 | v50.8,45.52 50.8,44.9 U1.17
  Bottom 0.305: v50.8,48.56 v50.8,45.52
FRONT_SCL  (via drill 0.6)
  Top 0.305: v53.34,46.02 53.34,46.01 U1.15 | X2.1 51.24,51.43 51.82,50.85 52.83,50.85 v53.09,50.6
  Bottom 0.305: v53.09,50.6 53.09,46.28 v53.34,46.02
FRONT_SDA  (via drill 0.6)
  Top 0.305: X2.2 50.74,50.15 51.31,49.58 v52.07,49.58 | v52.07,46.02 52.07,45.45 U1.16
  Bottom 0.305: v52.07,49.58 v52.07,46.02
GND  (via drill 0.35, 0.6)
  Top 0.254: U$12.P$2_EM 88.18,70.37 87.88,70.66 87.88,71.55 U$12.P$3-NC
  Top 0.305: 48.04,43.57 U1.19 47.57,43.08 47.57,41.89 46.96,41.28 v46.96,40.67 | U1.10 51.25,40.38 v49.25,38.38 | U1.99 54.09,34.46 53.06,35.49 v51.54,35.49 | v38.73,36.4 37.82,37.31 36.91,37.31 36.6,37.01 35.92,37.01 U1.49 34.7,38.23 33.86,38.23 33.55,37.92 33.25,37.92 32.93,38.24 C4.2 | v44.22,41.89 44.52,41.89 45.44,42.8 45.44,44.33 44.83,44.94 44.27,44.94 U1.26 | v44.83,29.7 44.83,29.09 44.22,28.48 44.22,27.69 U1.74 | 42.7,26.17 U1.74 | C5.1 42.09,23.3 43,24.21 43,24.82 42.39,25.43 42.39,25.86 U1.74 | U$2.P$4 53.98,24.5 54.23,24.26 | U$2.P$8 53.73,23.76 | 53.73,23.76 53.98,24.01 | U$2.P$9 53.48,23.51 53.73,23.76 | U$2.P$10 53.98,24.01 | 53.98,24.01 54.1,24.13 | U$2.P$11 54.48,23.75 54.1,24.13 | U$2.P$13 U$2.P$12 54.98,24.01 54.74,24.26 | 54.74,24.26 U$2.P$15 57.62,24.26 C14.2 | 54.74,24.26 v54.48,24.26 54.23,24.26 | C15.2 57.11,28.16 v56.01,27.05 | 54.23,24.26 54.1,24.13 | v37.08,7.16 39.66,7.16 40.16,7.67 | v54.36,16.56 53.81,16.56 | 35.81,11.99 35.22,11.99 C19.2 | X4.M2 1.57,51.91 v1.78,52.12 | 78.64,37.8 U2.1 | R2.1 61.88,38.21 v62.81,39.14 | 68.5,47.55 C3.2 | X2.18 42.74,54.98 43.18,55.42 45.72,55.42 v45.97,55.68 | R11.1 Q3.2 | X3.1 41.95,61.48 v40.39,63.04 | U$29.P$3-NC 51.5,80.57 U$29.P$2_EM 52.3,78.31 v52.32,78.28 | U$12.P$3-NC 85.98,72.06 v85.85,71.93 | LED1.C 7.01,36.38 USART.1
  Top 0.406: IC2.11 46.66,11.66 IC2.EH@1 | IC2.EH@2 40.16,11.66 40.46,11.66 40.51,11.61 | IC2.33 47.31,12.5 | 47.31,12.5 47.31,12.31 | 47.31,12.31 IC2.EH@1 | IC2.35 46.02,12.96 IC2.EH@1 | IC2.34 46.66,12.31 IC2.EH@1 | IC2.32 47.97,13.41 47.97,13.15 47.31,12.5 | IC2.12 47.31,12.31 | IC2.13 47.97,11.01 IC2.EH@1 | IC2.10 46.02,11.01 46.61,11.61 | 46.74,11.73 IC2.EH@1 | IC2.23 53.81,16.56 53.81,12.72 53.59,12.5 | 53.59,12.5 52.83,11.73 46.74,11.73 | 46.74,11.73 46.61,11.61 | 53.59,12.5 54.1,11.99 IC2.EH@3 55.41,10.72 v55.63,10.72 | IC2.1 40.16,7.67 40.16,11.26 40.51,11.61 | 40.51,11.61 40.64,11.73 46.48,11.73 46.61,11.61 | R7.1 57.34,17.05 57.4,16.98 | v38.61,13.51 38.61,12.24 38.35,11.99 | U2.4 U2.3 U2.2 U2.1 78.46,37.31 77.32,36.17 C26.2 | 62.66,39.3 v62.81,39.14 62.81,42.02 C2.2 62.49,42.34 62.49,43.89 | Q3.2 28.64,49.26 v28.19,48.82 | 16.26,54.91 17.7,53.48 Q2.2 R10.1 | U$31.P$3-NC 5.33,72.44 5.33,73.46 6.6,73.46 v7.62,74.47 | RESET.1 84.17,49.38 86.26,49.38 87.17,48.46 87.17,43.28 86.17,42.28 RUN.1 83.56,41.78 U2.4 | v75.59,41.45 78.13,41.45 U2.4 | v68.58,48.06 68.58,47.63 68.5,47.55 | C1.2 62.49,43.89 | v63.04,43.94 62.54,43.94 62.49,43.89 | v61.27,9.14 61.28,9.13 LED2.C
  Top 0.61: 62.66,45.48 C1.2 | 7.59,41.96 X4.M4 | X4.5 7.57,42.18 X4.M4 | X4.M1 X4.M2 X4.M3 | X4.M4 8.37,42.98 v10.41,42.98 9.45,42.98 8.36,41.89 USART.1 | U$31.P$2_EM 5.11,73.68 5.33,73.46 | v48.51,14.28 46.99,14.28 IC2.EH@1 46.99,13.41 47.97,13.41
  Top 0.813: C23.2 29.04,4.2 29.46,4.62 | C24.- 16.17,54.83 16.26,54.91 v16.76,55.42
  Top 1.016: C22.- 26.36,5.38 25.6,4.62
  Top 1.27: IC2.EH@2 38.35,11.99 35.81,11.99 35.05,11.23 C20.- 34.88,8.18 33.27,8.18 29.72,4.62 29.46,4.62 25.6,4.62 BAT.1 | C21.- 57.4,16.98 56.56,16.98 55.88,16.31 55.88,12.75 55.12,11.99 IC2.EH@3
  Bottom 0.305: 45.74,41.89 v46.96,40.67 | C7.2 39.64,35.48 39.34,35.18 | C6.2 42.7,40.37 42.24,39.91 | C9.2 50.33,37.31 50.16,37.47 | C8.2 47.56,26.96 47.57,26.95 | C16.2 50.62,22.94 | v56.01,27.05 56.01,25.78 v54.48,24.26 | R8.1 38.61,5.64 v37.08,7.16 | R9.2 53.53,17.39 v54.36,16.56 | 50.98,23.5 50.8,23.67 | v52.32,78.28 52.32,78.79 52.58,79.05 | R12.1 Q4.2 | U4.8 91.23,19.04 91.23,18.74 91.05,18.56 U4.6 87.2,18.55 C29.2 86.5,18.36 85.94,18.91 85.94,19.82 85.53,20.24 C28.2 | U3.8 2.27,17.57 2.27,17.87 2.45,18.05 U3.6 4.2,18.05 4.95,17.3 6.03,17.3 C25.2 8.24,17.36 C27.2 10.13,17.3 10.36,17.07
  Bottom 0.406: 63.12,41.2 63.12,39.45 v62.81,39.14 | 63.12,41.2 63.12,45.39 64.77,47.04 68.28,47.04 68.89,47.65 68.89,47.75 | 63.12,41.2 63.37,41.45 v75.59,41.45 | v45.97,55.68 45.72,55.68 44.96,54.91 | v28.19,48.82 28.19,54.91 29.46,56.19 | v7.62,74.47 7.62,76 8.38,76.76 9.88,76.76 U$20.P$1 | J1.2 68.07,52.63 68.89,51.82 68.89,47.75 | 68.89,47.75 v68.58,48.06 | C16.2 51.8,24.26 v54.48,24.26 65.66,24.26 66.45,23.47 69.8,23.47 70.71,24.38 70.71,27.43 71.93,28.65 79.25,28.65 84.43,23.47 84.43,20.49 C28.2 | v55.63,10.72 59.69,10.72 v61.27,9.14 | Q4.2 19.79,27.41 18.29,25.91 13.41,25.91 10.36,22.86
  Bottom 0.61: v51.54,35.49 51.54,36.09 50.16,37.47 v49.25,38.38 45.74,41.89 v44.22,41.89 42.24,39.91 v38.73,36.4 38.73,35.79 39.34,35.18 v44.83,29.7 47.57,26.95 47.98,26.95 50.16,24.77 50.21,24.77 50.8,24.18 50.8,23.67 50.8,23.36 C16.2 | C9.2 53.99,33.35 55.8,33.35 57.33,34.88 57.33,36.96 56.26,38.02 | v10.41,42.98 12.45,42.98 14.22,44.76 CAMERA.2 | 56.26,38.02 45.72,48.56 45.72,54.15 | 44.96,54.91 44.45,55.42 | v62.81,39.14 57.38,39.14 56.26,38.02 | U$20.P$1 10.03,78.41 10.67,79.05 20.07,79.05 | 20.07,79.05 30.23,79.05 | 30.23,79.05 40.39,79.05 | 40.39,79.05 52.58,79.05 53.85,79.05 | 53.85,79.05 63.25,79.05 | 63.25,79.05 73.15,79.05 | 73.15,79.05 82.8,79.05 83.82,78.03 83.82,76.73 U$11.P$1 85.25,76.6 85.85,76 v85.85,71.93 85.85,71.17 82.55,67.87 48.26,67.87 43.43,63.04 v40.39,63.04 | U$14.P$1 73.41,78.79 73.15,79.05 | U$15.P$1 63.63,78.66 63.25,79.05 | U$16.P$1 53.98,78.92 53.85,79.05 | U$17.P$1 40.26,78.92 40.39,79.05 | U$18.P$1 30.1,78.92 30.23,79.05 | U$19.P$1 20.19,78.92 20.07,79.05 | C12.2 14.21,15.37 14.31,15.47 | C11.2 14.21,12.85 14.36,13.01 14.82,13.01 14.82,13.46
  Bottom 0.813: C10.2 14.82,13.46 IC1.2 19.41,13.46 19.66,13.72 19.66,16.16 19.66,18.54 19.91,18.8 29.82,18.8 30.07,18.54 30.07,8.38 29.82,8.13 24.99,8.13 19.91,8.13 | C10.2 14.36,13.01 C13.2 14.31,15.47 | 14.11,12.75 C10.2 | 16.76,53.65 2.54,53.65 1.78,52.88 v1.78,52.12 1.78,29.01 3.35,27.43 9.14,27.43 10.36,26.21 10.36,22.86 10.36,17.07 10.36,15.85 10.84,15.37 C12.2 | v16.76,55.42 16.76,53.65 | 16.76,53.65 19.3,56.19 29.46,56.19 43.69,56.19 44.96,54.91 45.72,54.15
  Bottom 1.016: 24.99,8.13 24.99,4.93 BAT.1 | 19.91,8.13 19.91,15.9 19.66,16.16
  other vias: 24.43,39.17 45.21,14.28 45.21,10.21 48.51,10.21 54.36,51.87 33.27,36.12 51.31,66.09 66.04,70.92 57.15,71.93 36.83,71.68 26.67,71.68 22.61,80.06 17.02,71.68 76.71,71.17 77.98,80.06 46.99,57.45 45.97,57.45 44.96,57.45 43.94,57.45 42.93,57.45 41.91,57.45 48.01,57.45 49.02,57.45 50.04,57.45 51.05,57.45 51.97,57.45 27.64,6.25 28.85,6.25 27.64,7.77 28.85,7.77 23.98,7.77 22.76,7.77 21.54,7.77 20.32,7.77 30.38,7.77 30.38,8.99 30.38,10.21 30.38,11.43 30.38,12.65 30.38,13.87 30.38,15.09 30.38,16.31 30.38,17.53 29.46,18.75 22.3,42.52 19,52.98 2.84,36.53 14.12,27.69 14.12,23.42 14.43,9.09 36.68,10.92 68.99,4.52 60.45,3.91 69.29,9.4 69.29,13.36 63.5,25.86 61.06,22.2 71.42,33.17 67.16,39.27 75.39,44.45 75.39,53.9 48.87,32.87 88.49,35.92 85.75,2.39 8.03,2.69 8.33,31.34 14.27,78.38 79.65,27.08 7.72,13.36 82.09,13.67 90.93,10.01 91.54,27.08 2.54,27.99
  pour Bottom: 1.22,84.73 94.79,84.73 94.79,-4.57 -0.3,-4.57 -0.3,84.73
  pour Top: -10.36,84.73 117.96,84.73 117.96,-7.32 -10.36,-7.32
IR_A  (via drill 0.6)
  Top 0.305: X2.15 44.24,51.4 43.94,51.1 40.64,51.1 37.08,47.55 31.24,47.55 v30.48,46.79 | Q2.3 21.76,51.27 v21.08,50.6
  Bottom 0.305: v21.08,50.6 24.13,50.6 27.43,47.3 29.97,47.3 v30.48,46.79
IR_A_CONTROLL
  Top 0.305: Q2.1 24.05,53.48 24.64,52.88 24.64,50.09 25.91,48.82 25.91,47.3 27.94,45.26 36.18,45.26 U1.37
  Top 0.406: R10.2 Q2.1
IR_A_S  (via drill 0.6)
  Top 0.305: X3.4 44.24,65.03 42.42,66.85 13.21,66.85 12.7,66.35 7.87,66.35 6.6,67.62 v6.6,68.38 | R33.1 14.93,73.9 15.49,74.47 15.49,78.03 16.51,79.05 17.27,79.05 | 17.27,79.05 25.4,79.05 | 25.4,79.05 36.32,79.05 | 36.32,79.05 37.34,79.05 | 37.34,79.05 43.18,79.05 43.94,78.28 43.94,74.22 | R29.1 32.7,73.97 35.81,73.97 36.83,74.98 36.83,78.54 36.32,79.05 | R31.1 24.58,73.9 25.15,74.47 25.15,78.79 25.4,79.05 | 43.94,74.22 43.69,73.97 42.61,73.97 R27.1 | v16.26,80.06 17.27,79.05 | 43.94,74.22 43.94,73.2 v45.72,71.43 | v49.78,71.93 49.78,72.25 R25.1 | v38.35,80.06 37.34,79.05 | R21.1 67.88,73.9 67.56,74.22 67.56,78.03 65.28,80.32 | 65.28,80.32 v58.42,80.32 59.69,79.05 59.69,74.22 59.94,73.97 61.03,73.97 R23.1 | R19.1 78.04,73.9 77.47,74.47 77.47,78.03 75.18,80.32 65.28,80.32
  Bottom 0.305: v16.26,80.06 8.38,80.06 6.35,78.03 6.35,70.41 6.6,70.16 v6.6,68.38 | v45.72,71.43 49.28,71.43 v49.78,71.93 | v58.42,80.32 38.61,80.32 v38.35,80.06
IR_B
  Top 0.305: X2.16 43.74,51.92 43.43,51.61 39.62,51.61 36.32,48.31 30.99,48.31 30.23,49.07 30.23,53.14 28.7,54.66 27.77,54.66 Q3.3
IR_B_CONTROLL
  Top 0.305: Q3.1 R11.2 26.74,48.24 29.21,45.77 36.35,45.77 U1.36
IR_B_S  (via drill 0.6)
  Top 0.305: X3.3 43.74,64.52 42.42,65.84 39.88,65.84 39.62,66.09 38.86,66.09 v38.35,65.58 | 35.31,81.08 3.81,81.08 3.56,80.82 3.56,76.76 4.04,76.28 U$30.P$1_COL 5.07,76.25 8.13,76.25 8.64,75.74 8.64,73.71 8.38,73.46 v8.38,70.66 | 35.31,81.08 41.65,81.08 U$13.P$1_COL 41.94,81.87 | U$32.P$1_COL 86.88,81.08 86.87,81.08 86.36,81.59 v54.86,81.59 | v35.31,80.32 35.31,81.08
  Bottom 0.305: v54.86,81.59 36.58,81.59 v35.31,80.32 | v38.35,65.58 38.35,66.85 37.59,67.62 13.21,67.62 12.45,66.85 9.4,66.85 9.14,67.11 9.14,69.9 v8.38,70.66
IR_FRONT_S
  Top 0.305: U$29.P$1_COL 48.77,81.34 R36.1 48.7,77.27 47.75,77.27 47.24,76.76 X3.10
IR_LEFT_S
  Top 0.305: X3.5 44.74,65.29 42.42,67.62 13.21,67.62 12.45,66.85 8.64,66.85 8.13,67.36 8.13,68.82 R38.1 6.9,70.18 U$31.P$1_COL 5.08,70.15
IR_REMOTE  (via drill 0.35)
  Top 0.305: U1.1 55.27,36.37 58.93,36.37 59.44,36.88 59.44,38.71 60.96,40.23 v60.96,40.54
  Bottom 0.305: J1.1 65.84,55.17 64.62,53.95 64.62,48.16 60.96,44.5 v60.96,40.54
IR_RIGHT_S
  Top 0.305: X3.15 49.74,66.56 50.8,67.62 84.65,67.62 R34.1 84.9,67.36 87.88,67.36 89.41,68.89 89.41,72.95 88.55,73.81 U$12.P$1_COL
KEY  (via drill 0.35, 0.6)
  Top 0.305: U1.2 54.93,38.41 57.56,38.41 v58.06,37.9 | v84.12,39.32 84.12,37.84 RUN.3
  Bottom 0.305: v58.06,37.9 82.7,37.9 v84.12,39.32
LED  (via drill 0.35)
  Top 0.305: U1.67 39.31,27.74 35.31,27.74 34.8,27.23 33.53,27.23 22.61,38.15 22.61,38.46 v23.16,39.02
  Bottom 0.305: v23.16,39.02 23.16,39.62 22.55,40.23 19.81,40.23 18.29,38.71 18.29,36.58 17.37,35.66 7.62,35.66 6.71,36.58 6.71,38.71 8.13,40.13 R3.2
LED_BACK  (via drill 0.6)
  Top 0.305: U1.60 37.15,30.53 35.56,30.53 33.78,32.31 31.24,32.31 30.99,32.05 29.97,32.05 24.84,37.19 v24.84,37.44
  Bottom 0.305: R12.2 24.27,30.97 24.99,31.7 24.99,37.29 v24.84,37.44
  Bottom 0.61: Q4.1 R12.2
MOTOR_ENABLE  (via drill 0.6)
  Top 0.305: IC2.3 41.47,3.92 40.89,3.35 v39.62,3.35 | v55.12,18.09 55.12,19.29 R7.2 | v45.21,23.93 46.23,23.93 48.51,26.21 48.51,27.25 U1.81
  Top 0.406: IC2.25 52.52,19.8 52.83,20.12 54.68,20.12 R7.2
  Bottom 0.305: v39.62,3.35 42.93,3.35 43.43,2.85 45.72,2.85 46.99,4.12 46.99,19.61 48.77,21.39 | 48.77,21.39 53.66,21.39 R7.2 55.44,18.41 v55.12,18.09 | 48.77,21.39 46.74,21.39 44.96,23.16 44.96,23.67 v45.21,23.93
N$1
  Top 0.305: U1.12 52.18,42.72 53.34,42.72 54.1,41.96 54.1,40.69 54.79,40.01 58.29,40.01 58.55,40.26 58.55,41.33 Q1.3 59.41,42.19 C2.1
N$2
  Top 0.305: 55.82,45.81 Q1.1 56.23,44.46 56.41,44.27 | 56.41,44.27 56.72,43.97 60.38,43.97 60.68,44.27 60.68,45.73 C1.1 | U1.13 52.22,43.48 55.63,43.48 56.41,44.27
N$3
  Top 0.305: C4.1 34.21,39.44 U1.48
N$4
  Top 0.305: C5.2 40.88,25.07 U1.73
N$5  (via drill 0.35)
  Top 0.305: LED1.A 5.71,39.93 v5.79,39.93
  Bottom 0.305: R3.1 6.06,41.15 6.06,40.2 v5.79,39.93
N$6
  Top 0.305: U$2.P$14 56,23.76 56.51,23.24 56.51,23.04 56.9,22.66 59.18,22.66 59.44,22.91 59.44,24.04 C14.1
N$7  (via drill 0.35, 0.6)
  Top 0.406: IC2.8 44.72,3.87 v44.7,3.86 | IC2.7 44.06,4.5 v44.7,3.86 | IC2.9 45.37,4.52 v44.7,3.86
  Top 0.61: U$26.P$2 21.34,15.66 21.34,20.73 21.95,21.34 22.55,21.95 31.7,21.95 v32.31,21.34
  Bottom 0.61: v44.7,3.86 44.7,6.91 41.86,9.75 41.86,12.39 39.62,14.63 37.19,14.63 33.22,18.59 33.22,20.42 v32.31,21.34
N$8  (via drill 0.35, 0.6)
  Top 0.406: IC2.37 44.72,19.62 v44.96,19.86 | IC2.36 45.37,19.46 v44.96,19.86 | IC2.38 44.06,19.22 44.45,19.61 44.7,19.61 v44.96,19.86
  Top 0.61: 18.59,22.55 18.59,22.92 | 18.59,22.92 U$26.P$1 | 18.59,22.92 33.17,22.92 v33.83,22.25
  Bottom 0.61: v44.96,19.86 44.7,19.86 44.45,19.61 44.45,16.56 43.74,15.85 37.8,15.85 34.44,19.2 34.44,21.64 v33.83,22.25
N$9  (via drill 0.35, 0.6)
  Top 0.305: 75.89,12.8 75.68,12.8 U$27.P$1
  Top 0.406: IC2.14 48.62,3.51 v48.77,3.35 | IC2.15 49.27,3.85 v48.77,3.35 | IC2.16 49.91,3.74 49.53,3.35 v48.77,3.35
  Top 0.61: v73.15,15.24 75.32,13.07 U$27.P$1
  Bottom 0.61: v48.77,3.35 48.77,7.42 59.64,18.29 71.93,18.29 72.85,17.37 72.85,15.54 v73.15,15.24
N$10  (via drill 0.35, 0.6)
  Top 0.406: IC2.30 49.27,19.85 | IC2.31 48.62,19.2 v49.28,19.86 49.91,19.22 IC2.29
  Top 0.61: 49.27,19.85 v49.28,19.86 | 74.8,21.95 75.41,22.55 U$27.P$2 75.41,22.37 v73.15,20.12
  Bottom 0.61: v49.28,19.86 49.28,16.56 50.55,15.29 54.86,15.29 58.85,19.27 71.7,19.27 72.54,20.12 v73.15,20.12
N$11
  Top 0.406: LED2.A 64.86,6.18 R6.1
N$12
  Top 0.406: IC2.41 42.12,17.02 41.66,16.56 37.43,16.56 C17.2
N$13  (via drill 0.6)
  Top 0.305: IC2.2 40.81,6.58 v41.66,7.42
  Bottom 0.305: v41.66,7.42 41.66,6.21 R8.2
N$14
  Top 0.406: IC2.19 51.87,6.96 52.32,7.42 56.81,7.42 C18.1
N$15  (via drill 0.6)
  Top 0.305: IC2.24 53.16,17.4 52.07,16.31 51.82,16.31 v51.56,16.56
  Bottom 0.305: v51.56,16.56 51.56,18.53 R9.1
N$16  (via drill 0.35, 0.6)
  Top 0.305: v1.27,54.66 2.54,53.39 9.4,53.39 10.16,52.63 10.16,49.58 10.67,49.07 12.45,49.07 12.95,48.56 12.95,45.77 14.48,44.25 16.76,44.25 21.08,39.93 v21.69,39.06 | v67.67,24.99 67.67,5.64 v63.25,1.22 62.84,0.81 16.26,0.81 v15.54,1.52 15.54,29.57 v17.68,31.7
  Bottom 0.305: 2.03,55.17 LED3.C 2.06,54.66 v1.27,54.66 | v63.25,1.22 77.64,1.22 LED5.C | LED4.C 91.16,41.78 85.04,35.66 71.63,35.66 67.06,31.09 67.06,25.6 v67.67,24.99 | v15.54,1.52 16.94,1.52 LED6.C | Q4.3 17.68,30.11 v17.68,31.7 17.68,34.79 18.73,35.84 | v21.69,39.06 18.73,35.84 | 18.73,35.84 18.29,35.36
N$17
  Bottom 0.305: LED3.A R13.1
N$18  (via drill 0.35)
  Top 0.61: X4.1 5.41,48.13 3.3,46.02 3.3,43.74 4.06,42.98 4.06,40.44 1.02,37.39 1.02,13.31 v2.44,11.89
  Bottom 0.61: v2.44,11.89 2.44,9.64 D1.A
N$19
  Bottom 0.305: R14.1 LED4.A
N$20
  Bottom 0.305: U4.5 89.38,18.05 88.39,17.07 85.04,17.07 84.68,17.43 C28.1
N$21
  Bottom 0.305: R15.1 74.73,2.79 77.11,5.18 77.85,5.18 LED5.A
N$22  (via drill 0.6)
  Top 0.305: R21.2 v70.61,77.78
  Bottom 0.305: v70.61,77.78 LED8.C
N$23
  Bottom 0.406: R16.1 18.2,4.9 LED6.A
N$24  (via drill 0.6)
  Top 0.254: R19.2 80.9,76.38 v79.76,77.52
  Bottom 0.254: v79.76,77.52 79.76,77.49 LED7.C
N$25  (via drill 0.6)
  Top 0.305: R23.2 61.09,77.65 v60.96,77.78
  Bottom 0.305: v60.96,77.78 60.96,76.48 LED9.C
N$26  (via drill 0.6)
  Top 0.305: v50.8,77.78 50.8,76.44 R25.2
  Bottom 0.305: v50.8,77.78 50.8,76.99 LED10.C
N$27  (via drill 0.6)
  Top 0.305: v42.67,77.78 42.67,75.93 R27.2
  Bottom 0.305: LED11.C 42.55,77.65 v42.67,77.78
N$28  (via drill 0.6)
  Top 0.305: v32.77,78.03 32.77,75.93 R29.2
  Bottom 0.305: LED12.C 32.64,77.9 v32.77,78.03
N$29  (via drill 0.6)
  Top 0.305: v22.86,78.03 22.86,75.93 R31.2
  Bottom 0.305: LED13.C 22.73,77.9 v22.86,78.03
N$30  (via drill 0.6)
  Top 0.305: v12.7,77.78 12.7,75.93 R33.2
  Bottom 0.305: LED14.C 12.57,77.65 v12.7,77.78
N$31
  Top 0.406: U$30.P$2_EM 7.21,79.78 R37.1 6.92,78.03 U$30.P$3-NC
N$32
  Top 0.305: U$13.P$2_EM 44.64,80.57 U$13.P$3-NC 45.47,78.79 R35.1
N$33
  Top 0.254: U$32.P$2_EM 88.18,77.23 U$32.P$3-NC 86.36,79.05 R39.1
N$34
  Bottom 0.305: U3.5 4.53,18.55 5.23,19.25 C25.1
PWM_A_LEFT  (via drill 0.6)
  Top 0.305: IC2.43 40.81,19.69 40.64,19.86 39.62,19.86 v38.61,18.85 | v30.23,34.85 28.7,36.37 28.7,39.42 31.5,42.21 35.67,42.21 U1.42
  Bottom 0.305: v38.61,18.85 37.85,18.85 35.56,21.13 35.56,22.15 37.85,24.43 37.85,28.25 32.77,33.33 31.75,33.33 v30.23,34.85
PWM_A_RIGHT  (via drill 0.6)
  Top 0.305: IC2.21 53.16,4.29 v53.85,3.61 | v27.69,41.71 28.19,41.71 29.72,43.23 36.09,43.23 U1.40
  Bottom 0.305: v53.85,3.61 53.85,3.1 52.58,1.83 34.29,1.83 31.39,4.72 31.39,18.59 24.64,25.35 24.64,27.99 28.19,31.55 28.19,34.85 27.69,35.36 v27.69,41.71
PWM_B_LEFT  (via drill 0.6)
  Top 0.305: IC2.42 41.47,20.18 v41.66,20.37 | v29.72,37.39 29.72,39.42 32,41.71 35.49,41.71 U1.43
  Bottom 0.305: v41.66,20.37 41.4,20.62 37.08,20.62 36.58,21.13 36.58,21.64 38.86,23.93 38.86,28.5 32.77,34.59 32.51,34.59 v29.72,37.39
PWM_B_RIGHT  (via drill 0.6)
  Top 0.305: IC2.20 52.52,3.8 v52.32,3.61 | v28.7,40.95 28.7,41.2 30.23,42.72 35.88,42.72 U1.41
  Bottom 0.305: v52.32,3.61 52.32,2.85 51.82,2.34 34.8,2.34 32.31,4.83 32.31,18.9 25.4,25.81 25.4,27.48 28.96,31.04 28.96,35.36 28.7,35.61 v28.7,40.95
RESET
  Top 0.305: U1.14 52.52,44.5 53.59,44.5 54.61,45.52 54.61,47.04 54.86,47.3 63.5,47.3 64.26,46.53 64.26,43.48 64.77,42.98 66.08,42.98 R1.1 68.45,43.12 C3.1 80.86,43.07 82.45,44.65 82.62,44.82 RESET.3
SCL  (via drill 0.35, 0.6)
  Top 0.305: U$2.P$2 54.98,28.63 54.61,29.01 | 54.61,29.01 52.32,29.01 50.8,27.48 49.72,27.48 U1.83 | 54.61,29.01 57.78,32.18 R5.1 59.05,32.18 v58.42,31.55 | 71.6,40.39 U2.6 70.08,40.51 69.49,39.93 v69.49,36.88
  Bottom 0.305: v58.42,31.55 60.4,33.53 66.14,33.53 v69.49,36.88
SDA  (via drill 0.35, 0.6)
  Top 0.254: U$2.P$3 54.48,27.86 54.1,28.25
  Top 0.305: 54.1,28.25 52.58,28.25 51.05,26.72 | 51.05,26.72 50.8,26.47 50.02,26.47 U1.82 | R4.1 58.04,29.9 v57.66,30.28 | v52.07,26.72 51.05,26.72 | v70.71,36.58 70.71,36.27 70.1,35.66 68.89,35.66 68.58,35.97 68.58,40.54 69.83,41.78 U2.5
  Bottom 0.305: v52.07,26.72 51.94,26.85 51.94,27.61 53.34,29.01 55.37,29.01 56.64,30.28 v57.66,30.28 58.04,29.9 59.69,29.9 62.41,32.61 66.75,32.61 v70.71,36.58
USART1_RX  (via drill 0.6)
  Top 0.305: v22.1,32.82 v30.73,24.18 | v36.32,24.94 37.92,24.94 U1.69 | USART.3 13.44,39.35 14.02,39.93 16.46,39.93 18.9,37.49 20.32,36.07 v20.32,35.61
  Bottom 0.305: v20.32,35.61 20.32,34.59 v22.1,32.82 | v30.73,24.18 35.56,24.18 v36.32,24.94
USART1_TX  (via drill 0.6)
  Top 0.305: v35.31,26.21 38.47,26.21 U1.68 | v30.73,25.7 22.35,34.09 16.82,34.09 15.54,35.36 11.28,35.36 10.97,35.66 10.97,37.65 USART.2
  Bottom 0.305: v30.73,25.7 34.8,25.7 v35.31,26.21
USBDM
  Top 0.305: U1.70 39.16,25.46 37.62,23.93 35.31,23.93 16.51,42.72 13.72,42.72 10.41,46.02 10.41,46.79 9.87,47.33 X4.2
USBDP
  Top 0.305: U1.71 37.54,23.16 35.05,23.16 16.26,41.96 13.46,41.96 9.65,45.77 9.65,46.28 9.4,46.53 X4.3
VCC
  Top 0.406: IC2.4 42.12,2.03 41.91,1.83 | IC2.5 42.77,1.92 42.67,1.83 | IC2.6 43.41,2.1 43.69,1.83 | IC2.17 50.56,2.1 50.29,1.83 | IC2.18 51.22,1.92 51.31,1.83 | C18.2 58.59,5.8 58.67,5.89 | IC2.39 43.41,20.39 43.18,20.62 42.77,20.21 IC2.40 | IC2.28 50.56,21.37 50.55,21.39 | IC2.27 51.22,21.04 51.56,21.39 | IC2.26 51.87,21.18 52.07,21.39 | 43.69,21.39 38.35,21.39 37.08,20.12 C17.1 37,17.83 35.56,17.83 35.05,17.32 C19.1
  Top 0.813: C23.1 29.04,2.5 29.46,2.08
  Top 1.016: C23.1 28.01,2.4 27.43,1.83 22.86,1.83 22.15,2.54 BAT.2
  Top 1.27: 35.05,3.1 36.32,1.83 41.91,1.83 42.67,1.83 43.69,1.83 50.29,1.83 51.31,1.83 57.91,1.83 58.67,2.59 58.67,5.89 C21.+ 58.76,12.5 60.2,12.5 61.21,13.51 61.21,18.85 58.67,21.39 52.07,21.39 51.56,21.39 50.55,21.39 43.69,21.39 43.18,20.88 43.18,20.62 | C20.+ 35.05,3.1 | 35.05,3.1 34.04,2.08 29.46,2.08
  Bottom 0.61: 14.11,11.05 14.01,10.95 C11.1 10.62,9.6 D1.C
  Bottom 0.813: 14.07,11.02 C10.1 | C10.1 14.54,10.92 IC1.1 16.61,10.87 | 14.11,11.05 C10.1 | 14.33,11.14 C10.1
  Bottom 1.016: 22.15,5.59 BAT.2 21.29,5.49 19.51,5.49 16.46,8.54 16.46,10.72 IC1.1

## Text on the board
tNames: IR REMOTE | BOOT | + | + | USER | - | +